# EAGLE board H05 (EAGLE 6.6.0)
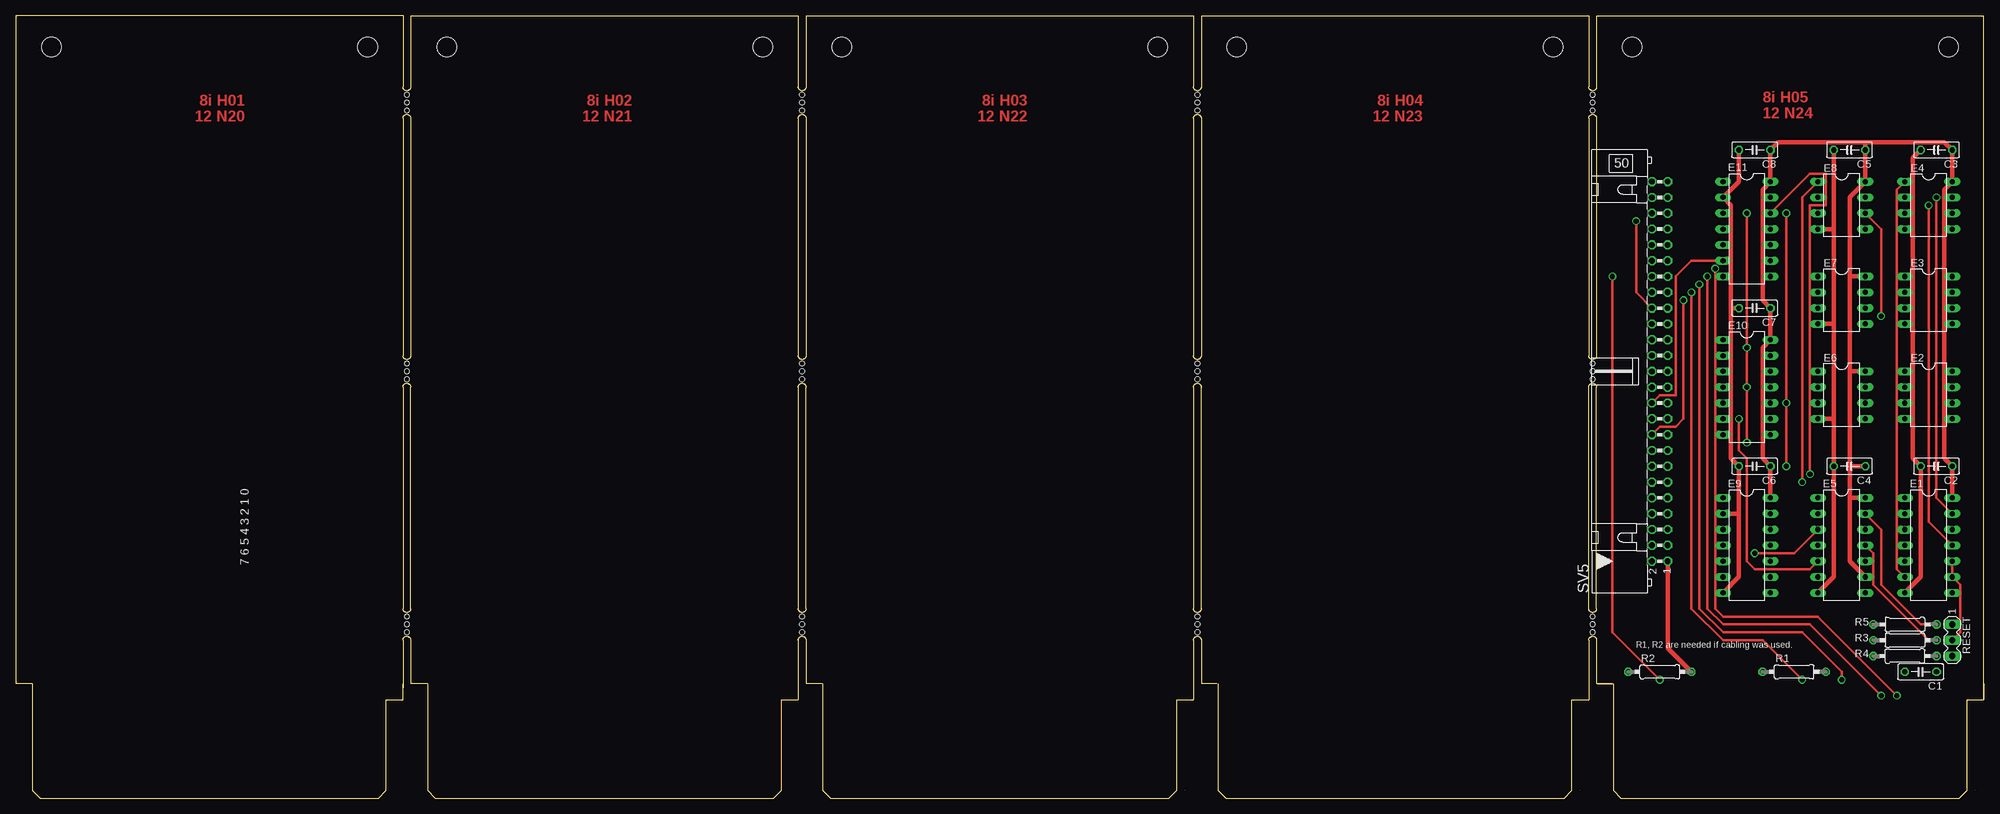
[diagram p0: board, top side]
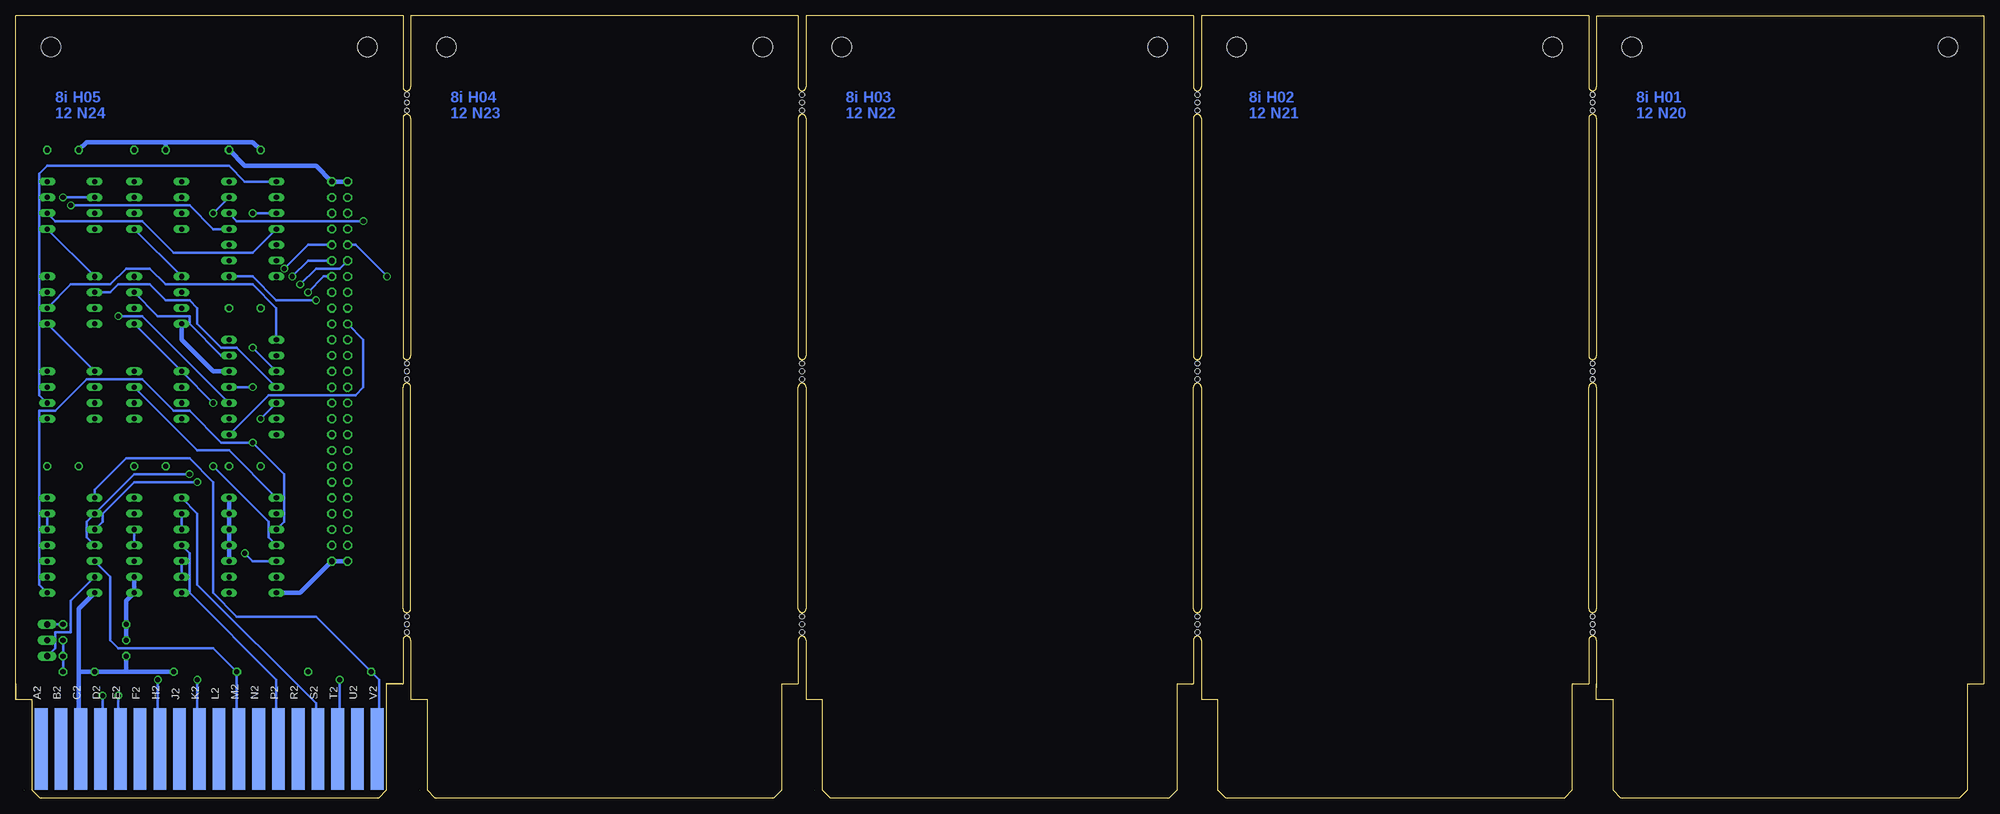
[diagram p1: board, bottom side, seen from below]

Size 316.23 x 125.73 mm. Coordinates in mm from the lower left corner, seen from the top.
Copper layers (1+16): Top 0.035mm / dielectric 1.5mm / Bottom 0.035mm
Design rules "16mils": minimum track width 16mil, minimum drill 32mil, track to track 15mil, track to pad 10mil, pad to pad 10mil, via to via 10mil, smd to smd 10mil, copper to edge 13mil, drill to drill 10mil, minimum pad ring 10mil, minimum via ring 8mil, stop-mask expansion 0mil, vias tented up to drill 0mil, thermal gap 10mil
Net classes: 1 supply: width 0.711 mm

## Footprints (pad centres in the part's own frame; a part is rotated, then mirrored left to right if it is on the bottom)
C050-025X075 = drill 0.813 octagon: 1 -2.54,0; 2 2.54,0
DIL14 = drill 0.813 long: 1 -7.62,-3.81; 2 -5.08,-3.81; 3 -2.54,-3.81; 4 0,-3.81; 5 2.54,-3.81; 6 5.08,-3.81; 7 7.62,-3.81; 8 7.62,3.81; 9 5.08,3.81; 10 2.54,3.81; 11 0,3.81; 12 -2.54,3.81; 13 -5.08,3.81; 14 -7.62,3.81
DIL08 = drill 0.813 long: 1 -3.81,-3.81; 2 -1.27,-3.81; 3 1.27,-3.81; 4 3.81,-3.81; 5 3.81,3.81; 6 1.27,3.81; 7 -1.27,3.81; 8 -3.81,3.81
EDGE-CON1 = smd 13.106 x 2.032 bottom: A2 7.938,4.128; B2 7.938,7.303; C2 7.938,10.477; D2 7.938,13.652; E2 7.938,16.828; F2 7.938,20.003; H2 7.938,23.177; J2 7.938,26.352; K2 7.938,29.527; L2 7.938,32.703; M2 7.938,35.877; N2 7.938,39.053; P2 7.938,42.227; R2 7.938,45.403; S2 7.938,48.578; T2 7.938,51.752; U2 7.938,54.928; V2 7.938,58.102
0207/10 = drill 0.813 octagon: 1 -5.08,0; 2 5.08,0
MA03-1 = drill 1.016 long: 1 -2.54,0; 2 0,0; 3 2.54,0
ML50L = drill 0.914 octagon: 1 -30.48,-1.27; 2 -30.48,1.27; 3 -27.94,-1.27; 4 -27.94,1.27; 5 -25.4,-1.27; 6 -25.4,1.27; 7 -22.86,-1.27; 8 -22.86,1.27; 9 -20.32,-1.27; 10 -20.32,1.27; 11 -17.78,-1.27; 12 -17.78,1.27; 13 -15.24,-1.27; 14 -15.24,1.27; 15 -12.7,-1.27; 16 -12.7,1.27; 17 -10.16,-1.27; 18 -10.16,1.27; 19 -7.62,-1.27; 20 -7.62,1.27; 21 -5.08,-1.27; 22 -5.08,1.27; 23 -2.54,-1.27; 24 -2.54,1.27; 25 0,-1.27; 26 0,1.27; 27 2.54,-1.27; 28 2.54,1.27; 29 5.08,-1.27; 30 5.08,1.27; 31 7.62,-1.27; 32 7.62,1.27; 33 10.16,-1.27; 34 10.16,1.27; 35 12.7,-1.27; 36 12.7,1.27; 37 15.24,-1.27; 38 15.24,1.27; 39 17.78,-1.27; 40 17.78,1.27; 41 20.32,-1.27; 42 20.32,1.27; 43 22.86,-1.27; 44 22.86,1.27; 45 25.4,-1.27; 46 25.4,1.27; 47 27.94,-1.27; 48 27.94,1.27; 49 30.48,-1.27; 50 30.48,1.27
DECPROTO11111 = hole 3.175: 183.515,120.65; 132.715,120.65; 69.266,120.65; 120.066,120.65; 56.566,120.65; 5.766,120.65; 247.015,120.65; 196.215,120.65; 310.515,120.65; 259.715,120.65 | hole 0.813: 62.865,69.85; 62.865,68.58; 62.865,67.31; 62.865,26.67; 62.865,27.94; 62.865,29.21; 62.865,113.03; 62.865,110.49; 62.865,111.76; 126.365,69.85; 126.365,68.58; 126.365,67.31; 126.365,26.67; 126.365,27.94; 126.365,29.21; 126.365,113.03; 126.365,110.49; 126.365,111.76; 189.865,26.67; 189.865,27.94; 189.865,29.21; 189.865,67.31; 189.865,68.58; 189.865,69.85; 189.865,110.49; 189.865,111.76; 189.865,113.03; 253.365,26.67; 253.365,27.94; 253.365,29.21; 253.365,67.31; 253.365,68.58; 253.365,69.85; 253.365,110.49; 253.365,111.76; 253.365,113.03

## Placement (x,y rotation side)
C1  0.1uF  [C050-025X075]  306.07,20.32 180 top
C2  0.1uF  [C050-025X075]  308.61,53.34 180 top
C3  0.1uF  [C050-025X075]  308.61,104.14 180 top
C4  0.1uF  [C050-025X075]  294.64,53.34 180 top
C5  0.1uF  [C050-025X075]  294.64,104.14 180 top
C6  0.1uF  [C050-025X075]  279.4,53.34 180 top
C7  0.1uF  [C050-025X075]  279.4,78.74 180 top
C8  0.1uF  [C050-025X075]  279.4,104.14 180 top
E1  74LS00N  [DIL14]  307.34,40.64 270 top
E2  MXD1000  [DIL08]  307.34,64.77 270 top
E3  MXD1000  [DIL08]  307.34,80.01 270 top
E4  MXD1000  [DIL08]  307.34,95.25 270 top
E5  74LS01N  [DIL14]  293.37,40.64 270 top
E6  MXD1000  [DIL08]  293.37,64.77 270 top
E7  MXD1000  [DIL08]  293.37,80.01 270 top
E8  MXD1000  [DIL08]  293.37,95.25 270 top
E9  74LS74N  [DIL14]  278.13,40.64 270 top
E10  74LS74N  [DIL14]  278.13,66.04 270 top
E11  74LS74N  [DIL14]  278.13,91.44 270 top
H05  [EDGE-CON1]  316.23,0 90 top
R1  100  [0207/10]  285.75,20.32 0 top
R2  100  [0207/10]  264.16,20.32 0 top
R3  1K  [0207/10]  303.53,25.4 180 top
R4  [0207/10]  303.53,22.86 0 top
R5  1K  [0207/10]  303.53,27.94 180 top
RESET  [MA03-1]  311.15,25.4 270 top
SV5  [ML50L]  264.16,68.58 90 top
U$6  DECPROTO11111  [DECPROTO11111]  0,0 0 top

## Library data of the parts
C1-C8 R1-R5 = rcl
E1 E5 E9-E11 = 74xx-us
E2-E4 E6-E8 = maxim; OC_FARNELL: unknown; OC_NEWARK: unknown
H05 U$6 = dec-con
RESET = con-lstb; OC_FARNELL: unknown; OC_NEWARK: unknown
SV5 = con-ml; OC_FARNELL: unknown; OC_NEWARK: unknown

## Nets
BTP2(0): E1.3 E8.1
BTP2(1): E1.1 H05.V2 R2.1
CS(0): E11.8 SV5.18
FS(1): E1.2 E1.4 E11.12 SV5.34
GND [supply]: C1.2 C2.2 C3.2 C4.2 C5.2 C6.2 C7.2 C8.2 E1.7 E2.4 E3.4 E4.4 E5.7 E6.4 E7.4 E8.4 E9.2 E9.7 E10.2 E10.7 E10.12 E11.2 E11.7 H05.C2 R1.2 R2.2 R4.1 SV5.1 SV5.2
MBODD_P: H05.T2 SV5.42
MEM08: H05.D2 SV5.41
MEM09: H05.E2 SV5.39
MEM10: H05.H2 SV5.40
MEM11: H05.K2 SV5.37
MEMDONE(0): E5.1 H05.S2
MEMDONE(1): E5.2 E5.3 E9.5
MEMSTART(0): E1.6 E4.1 RESET.3
MEMSTART(1): E1.5 H05.M2 R1.1
MS100: E1.12 E1.13 E4.2
MS150: E4.6 E11.4
MS250: E3.1 E4.5
MS350: E3.2 E10.4
MS400: E3.6 E10.1
MS500: E2.1 E3.5
MS650: E2.6 E11.1
N$1: E1.9 E1.10 RESET.2
NS100: E1.11 E11.11
OE(0): E11.6 SV5.22
PWR_OK: C1.1 E5.11 E5.12 R3.1 R4.2
PWR_OK(0): E5.13 R5.1 RESET.1
RESET: E1.8 E9.3 E10.3 E10.11 E11.3
STROBE(0): E5.4 H05.P2
STROBE(1): E5.5 E5.6 E10.5
TP150: E8.6 E10.10
TP250: E7.1 E8.5
TP300: E7.7 E10.13
TP500: E6.1 E7.5 E9.4 E11.13
TP550: E6.7 E9.1
VCC [supply]: C2.1 C3.1 C4.1 C5.1 C6.1 C7.1 C8.1 E1.14 E2.8 E3.8 E4.8 E5.8 E5.9 E5.14 E6.8 E7.8 E8.8 E9.10 E9.11 E9.12 E9.13 E9.14 E10.14 E11.10 E11.14 R3.2 R5.2 SV5.49 SV5.50
WE(0): E10.8 SV5.32

## Tracks (layer width: path | path; a pad name or v marks a point on that pad's centre or on a via)
BTP2(0)  (via drill 0.81)
  Top 0.406: v287.02,50.8 287.02,96.52 E8.1
  Bottom 0.406: v287.02,50.8 297.18,50.8 302.26,45.72 302.26,44.45 E1.3
BTP2(1)
  Bottom 0.406: H05.V2 258.13,8.57 257.81,8.89 257.81,19.05 R2.1 267.97,29.21 280.67,29.21 284.48,33.02 284.48,50.8 288.29,54.61 298.45,54.61 303.53,49.53 E1.1
CS(0)  (via drill 0.81)
  Top 0.406: SV5.18 264.16,59.69 266.7,59.69 267.97,60.96 v267.97,80.01
  Bottom 0.406: E11.8 278.13,83.82 274.32,80.01 v267.97,80.01
FS(1)  (via drill 0.81)
  Top 0.406: SV5.34 260.35,81.28 v260.35,92.71 | v288.29,52.07 288.29,95.25 290.83,95.25 290.83,100.33 288.29,100.33 E11.12
  Bottom 0.406: v260.35,92.71 280.67,92.71 E11.12 | E1.4 304.8,41.91 304.8,44.45 E1.2 297.18,52.07 v288.29,52.07
GND
  Top 0.711: E2.4 304.8,60.96 | 304.8,60.96 304.8,54.61 C2.2 306.07,35.56 E1.7 | E6.4 292.1,60.96 | 292.1,60.96 C4.2 292.1,35.56 E5.7 | 292.1,91.44 292.1,76.2 | 292.1,76.2 292.1,60.96 | E7.4 292.1,76.2 | E3.4 304.8,76.2 | 304.8,76.2 304.8,60.96 | E4.4 304.8,91.44 | 304.8,91.44 304.8,76.2 | E9.7 276.86,35.56 276.86,45.72 | 276.86,45.72 C6.2 275.59,54.61 275.59,58.42 | E9.2 276.86,45.72 | E10.7 275.59,58.42 | 275.59,83.82 275.59,95.25 E11.2 276.86,99.06 C8.2 | 275.59,83.82 275.59,78.74 | C7.2 275.59,78.74 | 275.59,78.74 275.59,71.12 | 275.59,71.12 275.59,58.42 | E11.7 275.59,83.82 | E10.2 275.59,71.12 | E8.4 292.1,91.44 | 292.1,91.44 C5.2 | 304.8,91.44 304.8,102.87 C3.2 | R2.2 265.43,24.13 SV5.1
  Bottom 0.711: H05.C2 305.75,8.57 306.07,8.89 306.07,20.32 | SV5.2 SV5.1 270.51,33.02 E9.7 | E10.12 284.48,68.58 289.56,73.66 E7.4 | 306.07,20.32 306.07,30.48 E1.7 | R1.2 298.45,20.32 | 298.45,20.32 C1.2 306.07,20.32 | R4.1 298.45,20.32 | C8.2 278.13,105.41 292.1,105.41 | 292.1,105.41 304.8,105.41 C3.2 | C5.2 292.1,105.41
MBODD_P  (via drill 0.81)
  Top 0.406: v256.54,83.82 256.54,26.67 v264.16,19.05
  Bottom 0.406: H05.T2 264.48,8.57 264.16,8.89 v264.16,19.05 | SV5.42 261.62,88.9 v256.54,83.82
MEM08  (via drill 0.81)
  Top 0.406: v273.05,85.09 273.05,30.48 274.32,29.21 289.56,29.21 v302.26,16.51
  Bottom 0.406: H05.D2 302.58,8.57 302.26,8.89 v302.26,16.51 | v273.05,85.09 269.24,88.9 SV5.41
MEM09  (via drill 0.81)
  Top 0.406: v271.78,83.82 271.78,30.48 274.32,27.94 288.29,27.94 v299.72,16.51
  Bottom 0.406: H05.E2 299.4,8.57 299.72,8.89 v299.72,16.51 | v271.78,83.82 269.24,86.36 SV5.39
MEM10  (via drill 0.81)
  Top 0.406: v270.51,82.55 270.51,30.48 274.32,26.67 287.02,26.67 293.37,20.32 v293.37,19.05
  Bottom 0.406: H05.H2 293.05,8.57 293.37,8.89 v293.37,19.05 | v270.51,82.55 267.97,85.09 264.16,85.09 SV5.40
MEM11  (via drill 0.81)
  Top 0.406: v269.24,81.28 269.24,30.48 274.32,25.4 280.67,25.4 v287.02,19.05
  Bottom 0.406: H05.K2 286.7,8.57 287.02,8.89 v287.02,19.05 | v269.24,81.28 266.7,83.82 SV5.37
MEMDONE(0)
  Bottom 0.406: H05.S2 267.65,8.57 267.97,8.89 267.97,15.24 287.02,34.29 287.02,45.72 E5.1
MEMDONE(1)  (via drill 0.81)
  Top 0.406: v279.4,39.37 285.75,39.37 E5.3
  Bottom 0.406: E5.2 E5.3 | E9.5 278.13,38.1 v279.4,39.37
MEMSTART(0)
  Top 0.406: E1.6 302.26,36.83 302.26,97.79 E4.1
  Bottom 0.406: RESET.3 309.88,24.13 309.88,26.67 307.34,26.67 307.34,31.75 E1.6
MEMSTART(1)
  Bottom 0.406: E1.5 300.99,35.56 300.99,25.4 299.72,24.13 284.48,24.13 R1.1 280.67,8.89 280.35,8.57 H05.M2
MS100  (via drill 0.81)
  Top 0.406: E1.13 308.61,48.26 v308.61,96.52
  Bottom 0.406: E1.13 E1.12 | v308.61,96.52 E4.2
MS150
  Bottom 0.406: E11.4 278.13,87.63 290.83,87.63 295.91,92.71 309.88,92.71 E4.6
MS250
  Bottom 0.406: E3.1 E4.5
MS350
  Bottom 0.406: E3.2 300.99,81.28 299.72,82.55 294.64,82.55 292.1,80.01 288.29,80.01 287.02,78.74 287.02,76.2 283.21,72.39 280.67,72.39 E10.4
MS400
  Bottom 0.406: E3.6 307.34,82.55 300.99,82.55 298.45,85.09 294.64,85.09 292.1,82.55 278.13,82.55 274.32,78.74 E10.1
MS500
  Bottom 0.406: E2.1 E3.5
MS650
  Bottom 0.406: E2.6 312.42,64.77 312.42,100.33 311.15,101.6 281.94,101.6 279.4,99.06 E11.1
N$1
  Top 0.406: RESET.2 312.42,26.67 312.42,34.29 E1.9 E1.10
NS100  (via drill 0.81)
  Top 0.406: E1.11 307.34,44.45 v307.34,95.25
  Bottom 0.406: E11.11 284.48,91.44 288.29,95.25 v307.34,95.25
OE(0)
  Top 0.406: SV5.22 264.16,64.77 266.7,64.77 266.7,83.82 269.24,86.36 E11.6
PWR_OK
  Top 0.406: R3.1 307.34,25.4 298.45,34.29 298.45,39.37 E5.11
  Bottom 0.406: C1.1 R4.2 R3.1 | E5.12 E5.11
PWR_OK(0)
  Top 0.406: E5.13 299.72,43.18 299.72,34.29 306.07,27.94 R5.1
  Bottom 0.406: R5.1 RESET.1
RESET  (via drill 0.81)
  Top 0.406: v278.13,93.98 v278.13,72.39 v278.13,66.04 v278.13,57.15
  Bottom 0.406: v278.13,93.98 E11.3 | v278.13,66.04 E10.11 | E10.3 v278.13,72.39 | E9.3 273.05,44.45 273.05,52.07 v278.13,57.15 283.21,57.15 288.29,62.23 290.83,62.23 295.91,67.31 304.8,67.31 309.88,62.23 312.42,62.23 312.42,34.29 E1.8
STROBE(0)
  Bottom 0.406: H05.P2 274.32,8.26 274.32,19.05 288.29,33.02 288.29,39.37 E5.4
STROBE(1)  (via drill 0.81)
  Top 0.406: v276.86,60.96 276.86,55.88 278.13,54.61 278.13,38.1 279.4,36.83 288.29,36.83 E5.5
  Bottom 0.406: E5.5 E5.6 | E10.5 v276.86,60.96
TP150  (via drill 0.81)
  Top 0.406: v299.72,77.47 299.72,91.44 E8.6
  Bottom 0.406: E10.10 295.91,77.47 v299.72,77.47
TP250
  Bottom 0.406: E8.5 E7.1
TP300
  Bottom 0.406: E10.13 283.21,71.12 288.29,76.2 288.29,77.47 293.37,77.47 E7.7
TP500  (via drill 0.81)
  Top 0.406: v284.48,93.98 v284.48,63.5 v284.48,53.34
  Bottom 0.406: E7.5 E6.1 v284.48,63.5 | E9.4 275.59,41.91 275.59,44.45 v284.48,53.34 | E11.13 v284.48,93.98
TP550
  Bottom 0.406: E9.1 281.94,55.88 287.02,55.88 E6.7
VCC
  Top 0.711: E9.14 C6.1 280.67,54.61 280.67,72.39 E10.14 C7.1 280.67,80.01 280.67,88.9 | E6.8 294.64,68.58 | 294.64,68.58 294.64,53.34 | 294.64,53.34 294.64,48.26 | 309.88,68.58 309.88,54.61 C2.1 E1.14 | 309.88,68.58 E2.8 | 294.64,83.82 294.64,96.52 E8.8 C5.1 297.18,105.41 | 294.64,83.82 294.64,68.58 | E7.8 294.64,83.82 | 309.88,83.82 309.88,97.79 E4.8 C3.1 309.88,105.41 297.18,105.41 | 309.88,83.82 309.88,68.58 | E3.8 309.88,83.82 | 280.67,88.9 280.67,97.79 E11.14 C8.1 283.21,105.41 297.18,105.41 | E11.10 280.67,88.9 | 294.64,48.26 294.64,38.1 E5.9 | E5.14 294.64,48.26 | C4.1 294.64,53.34
  Bottom 0.711: SV5.50 SV5.49 267.97,101.6 279.4,101.6 C8.1 | E5.9 E5.8 298.45,31.75 R5.2 R3.2 | E9.10 E9.11 E9.12 E9.13 E9.14
WE(0)
  Bottom 0.406: E10.8 275.59,64.77 261.62,64.77 260.35,66.04 260.35,73.66 SV5.32

## Text on the board
Top: 8i H01 | 8i H02 | 8i H03 | 8i H04 | 8i H05 | 12 N20 | 12 N21 | 12 N22 | 12 N23 | 12 N24
Bottom: 8i H01 | 8i H02 | 8i H03 | 8i H04 | 8i H05 | 12 N20 | 12 N21 | 12 N22 | 12 N23 | 12 N24
tPlace: 7 6 5 4 3 2 1 0 | R1, R2 are needed if cabling was used.
tValues: 8i H01 | 8i H02 | 8i H03 | 8i H04 | 8i H05 | 12 N20 | 12 N21 | 12 N22 | 12 N23 | 12 N24 | VCC | GND